# Altium PCB DT-LM.PcbDoc (part 1 of 2)
Units mm, origin at the board's own origin, x right, y up, seen from the top; angles counter-clockwise.
Board outline 100.25 x 53.25 mm, 2 copper layers (Top Layer, Bottom Layer); 126 components, 79 nets, 405 pads, 517 vias.
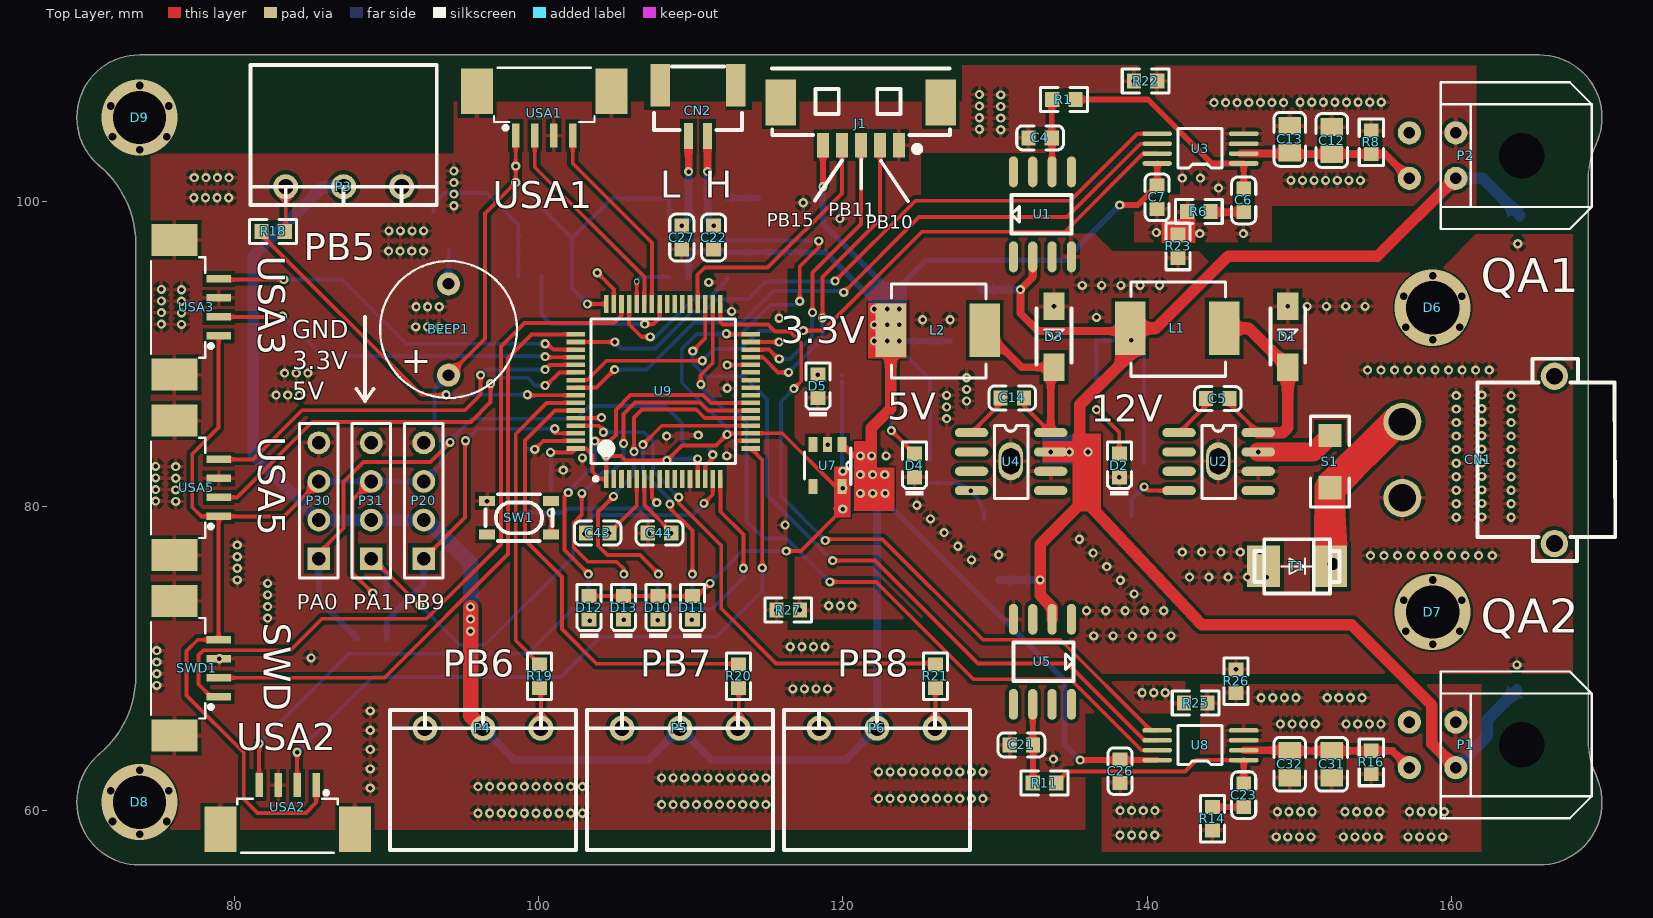
[diagram p0: Top Layer view]
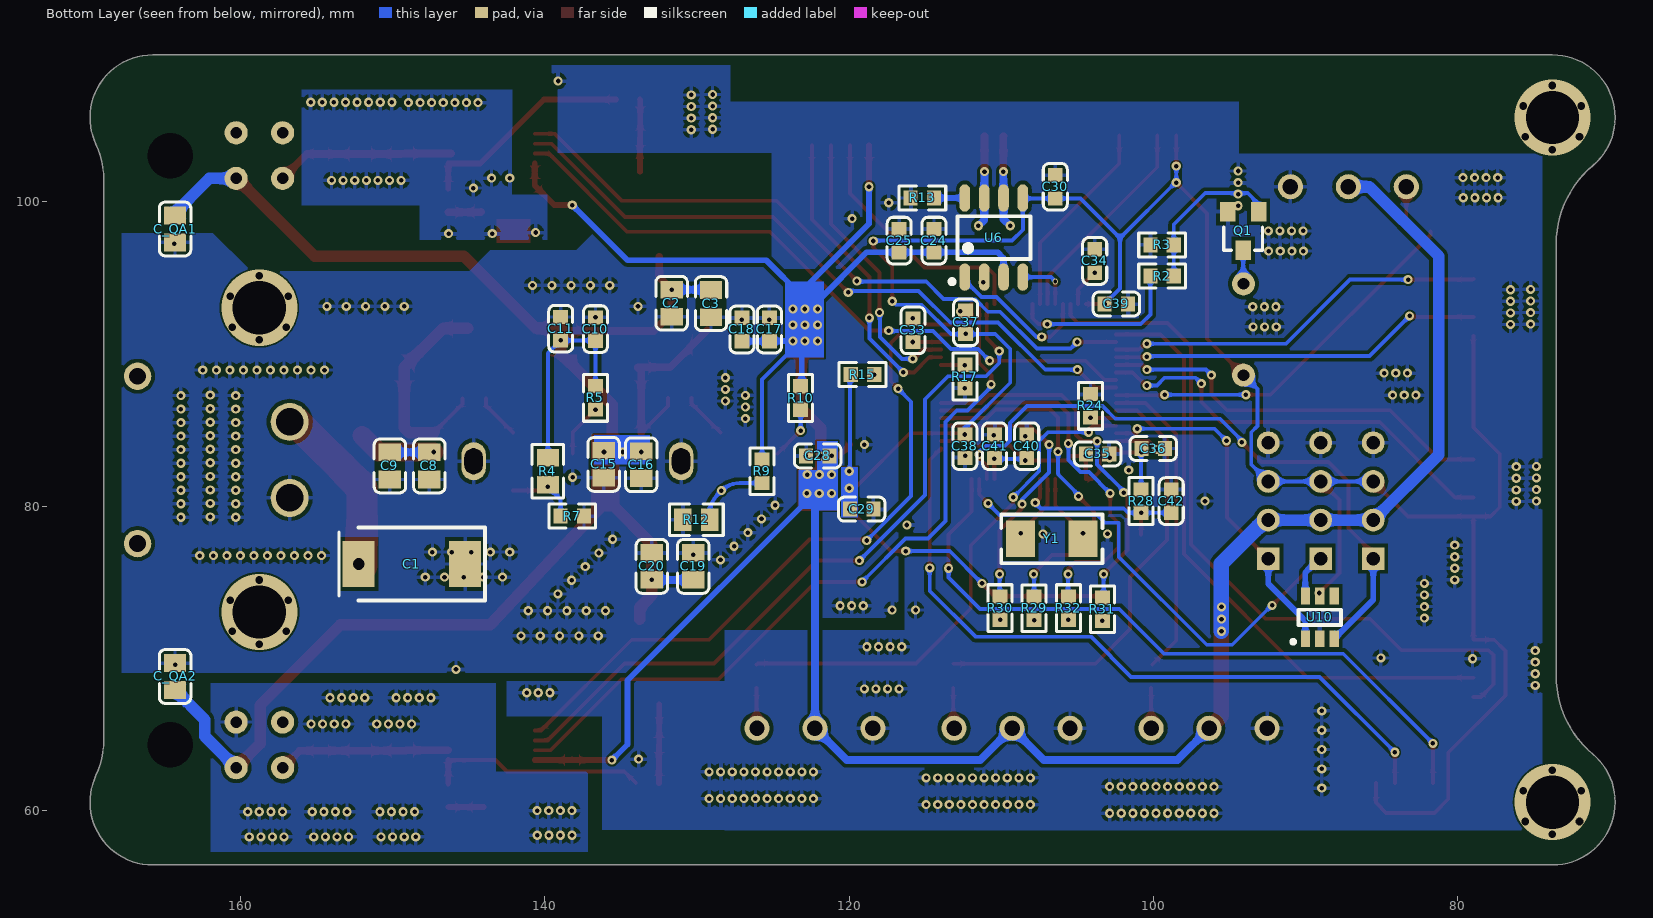
[diagram p1: Bottom Layer view, seen from below]

## Layer stack, top to bottom
Top Solder: solder mask 0.0102, Solder Resist, Dk 3.5
Top Layer: signal copper 0.0356
Dielectric 1: dielectric 0.32, FR-4, Dk 4.8
Bottom Layer: signal copper 0.0356
Bottom Solder: solder mask 0.0102, Solder Resist, Dk 3.5

## Board outline
69.649,60.546 cw(c73.776,60.546) 71.123,63.708 ccw(c66.789,68.873) 73.532,68.873 73.532,97.219 cw(c73.659,97.219) 73.532,97.22 ccw(c66.789,97.219) 71.124,102.384 ccw(c66.789,97.219) 71.123,102.384 cw(c73.776,105.546) 69.649,105.546 cw(c73.776,105.546) 73.776,109.674 cw(c73.776,109.546) 73.818,109.667 cw(c73.859,109.546) 73.859,109.674 165.776,109.674 cw(c165.776,105.546) 169.904,105.546 cw(c165.776,105.546) 169.517,103.802 ccw(c174.501,101.478) 169.002,101.478 169.002,64.614 ccw(c174.501,64.614) 169.517,62.29 cw(c165.776,60.546) 169.904,60.546 cw(c165.776,60.546) 165.776,56.419 73.776,56.419 cw(c73.776,60.546)

## Design rules (kind name [scope] priority, off if disabled: settings)
Clearance [All] p1: gap=0.127 ignorepadtopadclearanceinfootprint=FALSE except(0: Arc-Hole Track-Hole SMDPad-Hole THPad-Hole Via-Hole Fill-Hole Poly-Hole Region-Hole Text-Hole; 0.254: Arc-Fill Arc-Poly Arc-Region Track-Fill Track-Poly Track-Region SMDPad-Fill SMDPad-Poly SMDPad-Region THPad-Fill THPad-Poly THPad-Region)
HoleToHoleClearance [All] p1: gap=0.152 allowstackedmicrovias=TRUE
MinimumSolderMaskSliver [All] p1: minsoldermaskwidth=0.089
PolygonConnect [All] p1: connectstyle=Relief reliefconductorwidth=0.254 reliefentries=4 polygonreliefangle="90 Angle" airgapwidth=0.254
RoutingCorners [All] p1: cornerstyle=45-Degree minsetback=1 maxsetback=1
RoutingVias [All] p1: holewidth=0.3 width=0.6 viastyle="Through Hole" minholewidth=0.051 minwidth=0.127 maxholewidth=5.639 maxwidth=14.097
SilkToSilkClearance [All] p1: silktosilkclearance=0
SilkToSolderMaskClearance [IsPad] p1: minsilkscreentomaskgap=0 clearancetoexposedcopper=TRUE
SolderMaskExpansion [All] p1: expansion=0.051
Width [All] p1: maxlimit=2.54 minlimit=0.254 preferedwidth=0.254 minimp=50.000000 maximp=50.000000 favimp=50.000000
25 further rules are at their usual default settings.

## Components (designator, comment, footprint, x,y, rotation, side; value= is the part's Value field where it differs from the comment)
BEEP1 "Beep(0905)" Beep(0905) 94.082,91.618 r90 top
C1 "10UF" "TAN CAP" 147.168,76.835 r180 bottom
C2 "10uF/0805" 0805_C 131.674,93.345 r90 bottom
C3 "1uF/0805" 0805_C 129.083,93.32 r90 bottom
C4 "100nF" 0603_C 132.969,104.216 r0 top
C5 "10nF" 0603_C 144.653,87.071 r0 top
C6 "10uF" 0603_C 146.355,100.101 r90 top
C7 "1uF" 0603_C 140.665,100.305 r90 top
C8 "10uF" 0805_C 147.599,82.652 r90 bottom
C9 "1uF/0805" 0805_C 150.19,82.652 r90 bottom
C10 "22uF" 0603_C 136.677,91.643 r270 bottom
C11 "1uF" 0603_C 138.963,91.669 r270 bottom
C12 "100nF/0805" 0805_C 152.146,104.039 r270 top
C13 "1uF/0805" 0805_C 149.377,104.116 r270 top
C14 "10nF" 0603_C 131.14,87.122 r0 top
C15 "10uF" 0805_C 136.144,82.753 r90 bottom
C16 "1uF/0805" 0805_C 133.664,82.728 r90 bottom
C17 "22uF" 0603_C 125.247,91.618 r270 bottom
C18 "1uF" 0603_C 127.051,91.618 r270 bottom
C19 "10uF" 0805_C 130.251,76.048 r270 bottom
C20 "1uF/0805" 0805_C 132.969,76.048 r270 bottom
C21 "100nF" 0603_C 131.742,64.313 r0 top
C22 "100pF" 0603_C 111.506,97.663 r90 top
C23 "10uF" 0603_C 146.355,61.011 r90 top
C24 "100nF" LC-0603_C 114.427,97.46 r90 bottom
C25 "4.7uF" 0603_C 116.713,97.46 r90 bottom
C26 "1uF" 0603_C 138.227,62.586 r90 top
C27 "100pF" 0603_C 109.415,97.663 r270 top
C28 "2.2uF" 0603_C 122.072,83.312 r180 bottom
C29 "2.2uF" 0603_C 119.177,79.807 r0 bottom
C30 "4.7uF" 0603_C 106.454,101 r270 bottom
C31 "100nF/0805" 0805_C 152.146,63.042 r90 top
C32 "1uF/0805" 0805_C 149.377,63.042 r90 top
C33 "2.2uF" LC-0603_C 115.81,91.563 r270 bottom
C34 "2.2uF" LC-0603_C 103.861,96.122 r270 bottom
C35 "0.1uF" LC-0603_C 103.675,83.439 r180 bottom
C36 "0.1uF" LC-0603_C 100.016,83.793 r180 bottom
C37 "0.1uF" LC-0603_C 112.344,92.083 r90 bottom
C38 "0.1uF" LC-0603_C 112.395,83.947 r270 bottom
C39 "0.1uF" LC-0603_C 102.438,93.294 r180 bottom
C40 "10nF" LC-0603_C 108.331,83.947 r270 bottom
C41 "1uF" LC-0603_C 110.439,83.947 r270 bottom
C42 "100nF" LC-0603_C 98.831,80.34 r90 bottom
C43 "22pF" LC-0603_C 103.886,78.232 r0 top
C44 "22pF" LC-0603_C 107.95,78.232 r0 top
C_QA1 "1uF/0805" 0805_C 164.313,98.222 r90 bottom
C_QA2 "1uF/0805" 0805_C 164.313,68.809 r270 bottom
CN1 "XT30PW-M" CONN-TH_XT30PW-M 161.776,83.046 r90 top
CN2 "X1251WVS-02HF-LPSW" CONN-SMD_2P-V-P1.25-L_X1251WVS-02HF-LPSW 110.48,106 r180 top
D1 "B340" B340 149.25,91.135 r270 top
D2 "红灯 0603" 0603_LED_S1 138.176,82.677 r90 top
D3 "B340" B340 133.883,91.135 r270 top
D4 "蓝灯 0603" 0603_LED_S1 124.714,82.677 r90 top
D5 "黄灯" 0603_LED_S1 118.364,87.884 r90 top
D6 "定位孔" 定位孔 158.776,93.046 r0 top
D7 "定位孔" 定位孔 158.776,73.046 r0 top
D8 "定位孔" 定位孔 73.776,60.546 r0 top
D9 "定位孔" 定位孔 73.776,105.546 r0 top
D10 "黄灯 0603" LC-0603_LED_S1 107.848,73.322 r90 top
D11 "红灯 0603" LC-0603_LED_S1 110.109,73.322 r90 top
D12 "绿灯 0603" LC-0603_LED_S1 103.327,73.322 r90 top
D13 "蓝灯 0603" LC-0603_LED_S1 105.588,73.322 r90 top
J1 "MX1.25-5P" MX1.25WS-5P 121.183,106.534 r180 top
L1 "L_6.2mm" L_6.2mm 141.986,91.694 r90 top
L2 "L_6.2mm" L_6.2mm 126.238,91.567 r90 top
P1 "MX3.0 4pin" "MX3.0 4pin" 158.747,64.313 r270 top
P2 "MX3.0 4pin" "MX3.0 4pin" 158.747,103.048 r270 top
P3 "KF2EDG_3P" KF2EDG_3P 87.19,101 r180 top
P4 "KF2EDG_3P" KF2EDG_3P 96.342,65.404 r0 top
P5 "KF2EDG_3P" KF2EDG_3P 109.296,65.404 r0 top
P6 "KF2EDG_3P" KF2EDG_3P 122.25,65.404 r0 top
P20 "Header 4" HDR1X4 92.456,76.55 r90 top
P30 "Header 4" HDR1X4 85.555,76.55 r90 top
P31 "Header 4" HDR1X4 89.006,76.55 r90 top
Q1 "8050" NPN_SOT-23 94.107,98.095 r0 bottom
R1 "4.7Ω" 0603_R 134.536,106.731 r180 top
R2 "1KΩ" 0603_R 99.433,95.123 r0 bottom
R3 "10KΩ" 0603_R 99.433,97.18 r180 bottom
R4 "24K" LC-0805_R 139.802,82.301 r90 bottom
R5 "5.1KΩ" 0603_R 136.677,87.122 r90 bottom
R6 "0.3R" LC-0603_R 143.408,99.365 r0 top
R7 "2.7KΩ" 0603_R 138.201,79.35 r0 bottom
R8 "243Ω" 0603_R 154.737,103.919 r270 top
R9 "10KΩ" 0603_R 125.73,82.296 r90 bottom
R10 "1KΩ" 0603_R 123.19,87.114 r90 bottom
R11 "4.7Ω" 0603_R 133.256,61.798 r0 top
R12 "3.3KΩ" LC-0805_R 130.048,79.121 r180 bottom
R13 "1KΩ" 0603_R 115.189,100.263 r0 bottom
R14 "0.3R" LC-0603_R 144.297,59.461 r90 top
R15 "1KΩ" 0603_R 119.126,88.646 r0 bottom
R16 "243Ω" 0603_R 154.737,63.162 r90 top
R17 "10K" LC-0603_R 112.395,88.527 r270 bottom
R18 "510" LC-0603_R 82.55,98.069 r0 top
R19 "510" LC-0603_R 100.076,68.817 r270 top
R20 "510" LC-0603_R 113.157,68.817 r270 top
R21 "510" LC-0603_R 126.086,68.817 r270 top
R22 "0Ω (0R0) ±1%" LC-0603_R 139.903,107.95 r180 top
R23 "0Ω (0R0) ±1%" LC-0603_R 142.037,97.079 r270 top
R24 "10K" LC-0603_R 104.14,86.597 r270 bottom
R25 "0Ω (0R0) ±1%" LC-0603_R 143.192,67.056 r180 top
R26 "0Ω (0R0) ±1%" LC-0603_R 145.847,68.504 r90 top
R27 "0Ω (0R0) ±1%" LC-0603_R 116.408,73.177 r0 top
R28 "4.7K" LC-0603_R 100.813,80.34 r270 bottom
R29 "1KΩ (1001) ±1%" LC-0603_R 107.848,73.287 r90 bottom
R30 "1KΩ (1001) ±1%" LC-0603_R 110.076,73.304 r90 bottom
R31 "1KΩ (1001) ±1%" LC-0603_R 103.353,73.228 r90 bottom
R32 "1KΩ (1001) ±1%" LC-0603_R 105.588,73.304 r90 bottom
S1 "1A_Baoxiansi(1206)" 1A_Baoxiansi(1206) 152.019,82.931 r270 top
SW1 "SKRPADE010" KEY-SMD_4P-L4.2-W3.2-P2.20-LS4.6 98.713,79.24 r180 top
SWD1 "MOLEX1.25_4Pin" MOLEX1.25_4Pin 78.973,69.347 r90 top
T1 "SMB(DO-214AA)" SMB(DO-214AA) 149.936,76.048 r0 top
U1 "ADR445" ADR445 133.121,99.187 r90 top
U2 "TPS5430" TPS5430 144.705,82.931 r0 top
U3 "ADS8320" ADS8320 143.51,103.505 r180 top
U4 "TPS5430" TPS5430 131.064,82.931 r0 top
U5 "ADR445" ADR445 133.121,69.774 r270 top
U6 "TCAN1051" LC-SOIC-8_150mil 110.49,97.663 r180 bottom
U7 "TPS70933" TPS70933 118.999,82.677 r270 top value=Value
U8 "ADS8320" ADS8320 143.51,64.288 r180 top
U9 "STM32F405RGT6" TQFP64_V 108.204,87.544 r90 top
U10 "DW01+G" LC-SOT-23-6 89.068,72.692 r270 bottom
USA1 "MOLEX1.25_4Pin" MOLEX1.25_4Pin 100.375,104.368 r0 top
USA2 "MOLEX1.25_4Pin" MOLEX1.25_4Pin 83.505,61.671 r180 top
USA3 "MOLEX1.25_4Pin" MOLEX1.25_4Pin 78.973,93.071 r90 top
USA5 "MOLEX1.25_4Pin" MOLEX1.25_4Pin 78.973,81.209 r90 top
Y1 "25Mhz" LC-SMD-5032_2P 106.68,77.851 r0 bottom

## Footprints (in the part's own frame and the unit in brackets; to place one, negate y for a bottom-side part, rotate by r counter-clockwise, add the part's x,y. Pads: shape width x height; smd on the part's side, far side on the other; paste and mask are expansions set on the pad)
1A_Baoxiansi(1206) [mil]
  rect 60x60 smd: 1(67.5,0) 2(-67.5,0)
  silkscreen extent -118,-50 118,50
0603_C [mm]
  rect 0.93x0.98 smd: 1(-0.77,0) 2(0.77,0)
  silkscreen extent -1.53,-0.79 1.54,0.79, body extent -0.8,-0.4 0.8,0.4, height 0.3
0603_LED_S1 [mm]
  rect 0.93x0.98 smd: A(0.77,0) K(-0.77,0)
  silkscreen extent -1.98,-0.79 1.54,0.79, body extent -0.8,-0.4 0.8,0.4, height 0.6
0603_R [mm]
  rect 0.93x0.98 smd: 1(-0.77,0) 2(0.77,0)
  silkscreen extent -1.53,-0.79 1.54,0.79, body extent -0.85,-0.4 0.85,0.4, height 0.56
0805_C [mm]
  rect 1.16x1.47 smd: 1(-0.89,0) 2(0.89,0)
  silkscreen extent -1.77,-1.04 1.77,1.04, body extent -1,-0.63 1,0.63, height 0.77
ADR445 [mil]
  oval 80x24 smd: 1(-110,75) 2(-110,25) 3(-110,-25) 4(-110,-75) 5(110,-75) 6(110,-25) 7(110,25) 8(110,75)
  silkscreen extent -50,-75 50,80
ADS8320 [mm]
  oval 1.95x0.3 smd: 1(-2.845,0.975) 2(-2.845,0.325) 3(-2.845,-0.325) 4(-2.845,-0.975) 5(2.845,-0.975) 6(2.845,-0.325) 7(2.845,0.325) 8(2.845,0.975)
  silkscreen extent -1.42,-1.31 1.48,1.26, body extent -2.22,-1.31 2.28,1.26, height 1.2
B340 [mm]
  rect 1.8x1.4 smd: 1(-2,0) 2(2,0)
  silkscreen extent -1.87,-1.14 1.81,1.14
Beep(0905) [mil]
  round 60 hole 30 mask+1: 1(118.11,0) 2(-118.11,0)
  silkscreen extent -177,-177 177,177
CONN-SMD_2P-V-P1.25-L_X1251WVS-02HF-LPSW [mm]
  rect 0.6x1.7 smd: 1(-0.625,1.675) 2(0.625,1.675)
  rect 1.27x2.8 smd: 3(2.475,-1.675) 4(-2.475,-1.675)
  silkscreen extent -2.9,-2.9 2.9,1.27
CONN-TH_XT30PW-M [mm]
  round 2.5 hole 1.8: 1(-2.5,5) 2(2.5,5)
  round 1.8 hole 1.1: 3(5.5,-5) 4(-5.5,-5)
  silkscreen extent -6.65,-8.99 6.65,0.05
HDR1X4 [mm] "Connector; Header; 4 Position"
  rect 1.5x1.5 hole 0.9: 1(0,0)
  round 1.5 hole 0.9: 2(2.54,0) 3(5.08,0) 4(7.62,0)
  silkscreen extent -1.27,-1.27 8.89,1.27
KEY-SMD_4P-L4.2-W3.2-P2.20-LS4.6 [mm]
  rect 1.05x0.65 smd: 1(-2.1,1.1) 2(2.1,1.1) 3(-2.1,-1.1) 4(2.1,-1.1)
  silkscreen extent -2.2,-1.55 2.2,1.52
KF2EDG_3P [mil]
  round 65 hole 40: 1(-150,0) 2(0,0) 3(150,0)
  silkscreen extent -241,-315 241,47
L_6.2mm [mm]
  rect 3.5x2 smd: 1(0,3.086) 2(0,-3.086)
  silkscreen extent -3.15,-3.16 3.05,3.04
LC-0603_C [mm]
  rect 0.93x0.98 smd: 1(-0.77,0) 2(0.77,0)
  silkscreen extent -1.53,-0.79 1.54,0.79, body extent -0.8,-0.4 0.8,0.4, height 0.3
LC-0603_LED_S1 [mm]
  rect 0.93x0.98 smd: A(0.77,0) K(-0.77,0)
  silkscreen extent -1.98,-0.79 1.54,0.79, body extent -0.8,-0.4 0.8,0.4, height 0.6
LC-0603_R [mm]
  rect 0.93x0.98 smd: 1(-0.77,0) 2(0.77,0)
  silkscreen extent -1.53,-0.79 1.54,0.79, body extent -0.85,-0.4 0.85,0.4, height 0.56
LC-0805_R [mm]
  rect 1.16x1.47 smd: 1(-0.89,0) 2(0.89,0)
  silkscreen extent -1.77,-1.04 1.77,1.03, body extent -1,-0.63 1,0.63, height 0.49
LC-SMD-5032_2P [mm]
  rect 1.9x2.4 smd: 1(-2.05,0) 2(2.05,0)
  silkscreen extent -3.32,-1.6 3.32,1.6
LC-SOIC-8_150mil [mm]
  oval 0.7x1.8 smd: 1(-1.905,-2.6) 2(-0.635,-2.6) 3(0.635,-2.6) 4(1.905,-2.6) 5(1.905,2.6) 6(0.635,2.6) 7(-0.635,2.6) 8(-1.905,2.6)
  silkscreen extent -2.9,-3.05 2.4,1.4, body extent -2.45,-2.99 2.45,3.01, height 1.7
LC-SOT-23-6 [mm]
  rect 1.1x0.6 smd: 1(1.4,-0.95) 2(1.4,0) 3(1.4,0.95) 4(-1.4,0.95) 5(-1.4,0) 6(-1.4,-0.95)
  silkscreen extent -0.5,-1.87 1.72,1.4
MOLEX1.25_4Pin [mm]
  rect 0.5x1.6 smd: 1(-1.875,0) 2(-0.625,0) 3(0.625,0) 4(1.875,0)
  rect 2.1x3 smd: 5(-4.425,2.9) 6(4.425,2.9)
  silkscreen extent -3.3,0.38 3.3,4.44
MX1.25WS-5P [mm]
  rect 2x3 smd: 0(-5.257,0) 0(5.257,0)
  rect 0.8x1.6 smd: 1(-2.514,2.811) 2(-1.264,2.811) 3(-0.014,2.811) 4(1.236,2.811) 5(2.486,2.811)
  silkscreen extent -5.86,-2.23 5.83,3.25, body extent -5.74,-2.21 5.66,2.98, height 3.4
"MX3.0 4pin" [mil]
  round 60 hole 30 mask+1: 1(59.06,61.06) 2(59.06,-59.05) 3(-59.05,61.06) 4(-59.05,-59.05)
  round 0 hole 118.11: ""(0,231.13)
  silkscreen extent -190,22 190,413, body extent -200,-70 200,412, height 348
NPN_SOT-23 [mil]
  rect 40x50 smd: B(-40,-50) C(0,50) E(40,-50)
  silkscreen extent -50,-10 50,50
SMB(DO-214AA) [mil]
  rect 85x108 smd: 1(-90,0) 2(84,0)
  silkscreen extent -113,-70 107,70, body extent -110,-77 110,77, height 98
"TAN CAP" [mm]
  rect 2.1x3 smd: 1(-5.08,-0.635) 2(1.92,-0.635)
  silkscreen extent -6.38,-3.04 3.22,1.76
TPS5430 [mm]
  oval 2.2x0.6 smd: 1(-2.6,1.905) 2(-2.6,0.635) 3(-2.6,-0.635) 4(-2.6,-1.905) 5(2.6,-1.905) 6(2.6,-0.635) 7(2.6,0.635) 8(2.6,1.905)
  oval 1.6x2.5 hole 1.2 slot 1.7 at 90 deg: 9(-0.016,0.025)
  silkscreen extent -1.1,-2.41 1.1,2.36
TPS70933 [mm]
  rect 1x0.6 smd paste+0 mask+0.051: 1(-1.375,0.95) 2(-1.375,0) 3(-1.375,-0.95) 4(1.375,-0.95) 5(1.375,0.95)
  silkscreen extent -1.14,-1.52 1.23,1.52, body extent -1.32,-1.42 1.48,1.48, height 1.45
TQFP64_V [mm] "Thin QFP, 64-Leads, Body 10x10mm, Pitch 0.5mm, ST Recommended"
  rect 1.2x0.3 smd: 1(-5.75,3.75) 2(-5.75,3.25) 3(-5.75,2.75) 4(-5.75,2.25) 5(-5.75,1.75) 6(-5.75,1.25) 7(-5.75,0.75) 8(-5.75,0.25) 9(-5.75,-0.25) 10(-5.75,-0.75) 11(-5.75,-1.25) 12(-5.75,-1.75) 13(-5.75,-2.25) 14(-5.75,-2.75) 15(-5.75,-3.25) 16(-5.75,-3.75) 33(5.75,-3.75) 34(5.75,-3.25) 35(5.75,-2.75) 36(5.75,-2.25) 37(5.75,-1.75) 38(5.75,-1.25) 39(5.75,-0.75) 40(5.75,-0.25) 41(5.75,0.25) 42(5.75,0.75) 43(5.75,1.25) 44(5.75,1.75) 45(5.75,2.25) 46(5.75,2.75) 47(5.75,3.25) 48(5.75,3.75)
  rect 0.3x1.2 smd: 17(-3.75,-5.75) 18(-3.25,-5.75) 19(-2.75,-5.75) 20(-2.25,-5.75) 21(-1.75,-5.75) 22(-1.25,-5.75) 23(-0.75,-5.75) 24(-0.25,-5.75) 25(0.25,-5.75) 26(0.75,-5.75) 27(1.25,-5.75) 28(1.75,-5.75) 29(2.25,-5.75) 30(2.75,-5.75) 31(3.25,-5.75) 32(3.75,-5.75) 49(3.75,5.75) 50(3.25,5.75) 51(2.75,5.75) 52(2.25,5.75) 53(1.75,5.75) 54(1.25,5.75) 55(0.75,5.75) 56(0.25,5.75) 57(-0.25,5.75) 58(-0.75,5.75) 59(-1.25,5.75) 60(-1.75,5.75) 61(-2.25,5.75) 62(-2.75,5.75) 63(-3.25,5.75) 64(-3.75,5.75)
  silkscreen extent -5.87,-4.75 4.75,4.75, body extent -5,-5 5,5, height 1.6
定位孔 [mm]

## Part data
C1: library part "TAN CAP"
C2 C31: library part "0805 100nF(104) 10% 50V", "贴片电容", Package=0805, SuppliersPartNumber=C49678, ComponentLink1Description=供?, ComponentLink1URL=http://www.szlcsc.com/product/details_50686.html, Supplier=LC
C3 C9 C12 C13 C16 C20 C32 C_QA1 C_QA2: library part "0805 1uF (105) 10% 50V", "贴片电容", Package=0805, SuppliersPartNumber=C28323, ComponentLink1Description=供?, ComponentLink1URL=http://www.szlcsc.com/product/details_29074.html, Supplier=LC
C4 C6 C21 C22 C23 C27: library part "0603 100nF (104) 10% 50V", "贴片电容", Package=0603, SuppliersPartNumber=C14663, ComponentLink1Description=供?, ComponentLink1URL=http://www.szlcsc.com/product/details_15331.html, Supplier=LC
C5 C14: library part "0603 10nF (103) 10% 50V", "贴片电容", Package=0603, SuppliersPartNumber=C57112, ComponentLink1Description=供?, ComponentLink1URL=http://www.szlcsc.com/product/details_58143.html, Supplier=LC
C7 C10 C17 C26 C35 C36 C37 C38 C39: library part "0603 10uF (106) 10% 10V", "贴片电容", Package=0603, SuppliersPartNumber=C19702, ComponentLink1Description=供?, ComponentLink1URL=http://www.szlcsc.com/product/details_20411.html, Supplier=LC
C8 C15 C19: library part "0805 10uF (106) 10% 25V", "贴片电容", Package=0805, SuppliersPartNumber=C15850, ComponentLink1Description=供?, ComponentLink1URL=http://www.szlcsc.com/product/details_16532.html, Supplier=LC
C11 C18 C28 C29 C43 C44: library part "0603 1uF (105) 10% 50V", "贴片电容", Package=0603, SuppliersPartNumber=C15849, ComponentLink1Description=供?, ComponentLink1URL=http://www.szlcsc.com/product/details_16531.html, Supplier=LC
C24: library part "0603 1nF (102) 10% 50V", "贴片电容", Package=0603, SuppliersPartNumber=C1588, ComponentLink1Description=供?, ComponentLink1URL=http://www.szlcsc.com/product/details_1940.html, Supplier=LC
C25 C30: library part "0603 4.7uF (475) 10% 16V", "贴片电容", Package=0603, SuppliersPartNumber=C19666, ComponentLink1Description=供?, ComponentLink1URL=http://www.szlcsc.com/product/details_20375.html, Supplier=LC
C33 C34 C40 C41: library part "0603 1.5nF (152) 10% 50V", "贴片电容", Package=0603, SuppliersPartNumber=C1595, ComponentLink1Description=供?, ComponentLink1URL=http://www.szlcsc.com/product/details_1947.html, Supplier=LC
C42: library part "0603 1.5pF (1R5) 0.25pF 50V", "贴片电容", Package=0603, SuppliersPartNumber=C1639, ComponentLink1Description=供?, ComponentLink1URL=http://www.szlcsc.com/product/details_1991.html, Supplier=LC
CN1: BOM_Manufacturer="Changzhou Amass Elec", BOM_Manufacturer Part=XT30PW-M, BOM_Supplier=LCSC, BOM_Supplier Part=C431092, Contributor=LCSC, spicePre=C, spiceSymbolName=XT30PW-M
CN2: BOM_Manufacturer="XKB Enterprise", BOM_Manufacturer Part=X1251WVS-02HF-LPSW, BOM_Supplier=LCSC, BOM_Supplier Part=C388714, Contributor=LCSC, spicePre=C
D2 D11: library part "0603 红灯", "发光二极管", Package=0603, SuppliersPartNumber=C2286, ComponentLink1Description=供?, ComponentLink1URL=http://www.szlcsc.com/product/details_2659.html, Supplier=LC
D4 D13: library part "0603 蓝灯", "发光二极管", Package=0603, SuppliersPartNumber=C72041, ComponentLink1Description=供?, ComponentLink1URL=http://www.szlcsc.com/product/details_73150.html, Supplier=LC
D5 D10: library part "0603 黄灯", "发光二极管", Package=0603, SuppliersPartNumber=C72038, ComponentLink1Description=供?, ComponentLink1URL=http://www.szlcsc.com/product/details_73147.html, Supplier=LC
D12: library part "0603 绿灯", "发光二极管", Package=0603, SuppliersPartNumber=C72043, ComponentLink1Description=供?, ComponentLink1URL=http://www.szlcsc.com/product/details_73152.html, Supplier=LC
P20 P30 P31: "Header, 4-Pin", LatestRevisionDate=17-Jul-2002, LatestRevisionNote="Re-released for DXP Platform.", Publisher="Altium Limited"
Q1: library part NPN_SOT-23
R1 R8 R11 R16: library part "0603 4.7Ω (4R70) 1%", "贴片电阻", Package=0603, SuppliersPartNumber=C23164, ComponentLink1Description=供?, ComponentLink1URL=http://www.szlcsc.com/product/details_23891.html, Supplier=LC
R2 R9 R10 R13 R15 R29 R30 R31 R32: library part "0603 1KΩ (1001) 1%", "贴片电阻", Package=0603, SuppliersPartNumber=C21190, ComponentLink1Description=供?, ComponentLink1URL=http://www.szlcsc.com/product/details_21904.html, Supplier=LC
R3 R5 R7: library part "0603 10KΩ (1002) 1%", "贴片电阻", Package=0603, SuppliersPartNumber=C25804, ComponentLink1Description=供?, ComponentLink1URL=http://www.szlcsc.com/product/details_26547.html, Supplier=LC
R4 R12: library part "0805 1.2KΩ (1201) 1%", "贴片电阻", Package=0805, SuppliersPartNumber=C17379, ComponentLink1Description=供?, ComponentLink1URL=http://www.szlcsc.com/product/details_18067.html, Supplier=LC
R6 R14: library part "0603 20Ω (20R0) 1%", "贴片电阻", Package=0603, SuppliersPartNumber=C22950, ComponentLink1Description=供?, ComponentLink1URL=http://www.szlcsc.com/product/details_23677.html, Supplier=LC
R17 R24: library part "0603 1.5MΩ (1504) 1%", "贴片电阻", Package=0603, SuppliersPartNumber=C4172, ComponentLink1Description=供?, ComponentLink1URL=http://www.szlcsc.com/product/details_4579.html, Supplier=LC
R18 R19 R20 R21: library part "0603 1Ω (1R00) 1%", "贴片电阻", Package=0603, SuppliersPartNumber=C22936, ComponentLink1Description=供?, ComponentLink1URL=http://www.szlcsc.com/product/details_23663.html, Supplier=LC
R22 R23 R25 R26 R27: library part "0603 0Ω (0R0) 1%", "贴片电阻", Package=0603, SuppliersPartNumber=C21189, ComponentLink1Description=供?, ComponentLink1URL=http://www.szlcsc.com/product/details_21903.html, Supplier=LC
R28: library part "0603 2.2KΩ (2201) 1%", "贴片电阻", Package=0603, SuppliersPartNumber=C4190, ComponentLink1Description=供?, ComponentLink1URL=http://www.szlcsc.com/product/details_4597.html, Supplier=LC
SW1: BOM_Manufacturer=ALPS, BOM_Manufacturer Part=SKRPADE010, BOM_Supplier=LCSC, BOM_Supplier Part=C127488, Contributor=LCSC, spicePre=S, spiceSymbolName=SKRPADE010
U7: "DC-DCоƬ", Alternate_PartNumber=TPS709xx, Manufacturer="Texas Instruments", CompType=IC, MountType=SMT, PackageReference=SOT_23_5, PartNumber=TPS709xx, PIN_COUNT=5, RefDes=RefDes, RoHS=Y, TYPE=TYPE
U9: "ARM Cortex-M4 32b MCU+FPU, 210DMIP, 1024 kB Flash, 192+4 kB RAM, 51 I/Os, 64-pin LQFP, -40 to +85癈, Tray", Operating Frequency (Processor Speed)=168MHz, 16-bit Timers (IC/OC/PWM)=12x16-bit(24/24/30), 32-bit Timer (IC/OC/PWM)="2x32-bit (8/8/8)", A/D Converter=16x12-bit, ComponentLink1Description="Manufacturer URL", ComponentLink1URL=http://www.st.com/, ComponentLink2Description="STM32F405/7 Datasheet", ComponentLink2URL=http://www.st.com/internet/com/TECHNICAL_RESOURCES/TECHNICAL_LITERATURE/DATASHEET/DM00037051.pdf, ComponentLink3Description="STM32F4 Web Page", ComponentLink3URL=http://www.st.com/internet/mcu/subclass/1521.jsp, D/A Converter=2x12-bit, DatasheetVersion="rev2, Jan-2012", Internal RAM=192kB, Other Timer Functions="2xWDG, RTC, 24-bit down counter", PackageDescription="64-Pin Low Profile Quad Flat Package, 10x10 mm Body, 0.5 mm Pitch", PackageReference=TQFP64, PackageVersion=2012, Serial Interface="3xSPI/2xI2S/2xI2C/3xUSART(IrDa, ISO7816)/3xUART/1xUSB OTG FS/HS, 2xCAN/ SDIO"
U10: "电池保护芯片", Package=SOT-23-6, SuppliersPartNumber=C14213, ComponentLink1Description=供?, ComponentLink1URL=http://www.szlcsc.com/product/details_14870.html, Supplier=LC
Y1: library part "SMD-5032_2P 8MHz 20ppm 20pF", "贴片晶振", Package=SMD-5032_2P, SuppliersPartNumber=C18560, ComponentLink1Description=供?, ComponentLink1URL=http://www.szlcsc.com/product/details_19261.html, Supplier=LC

## Via types
v1: diameter 0.6, hole 0.3, Top Layer to Bottom Layer, 487 vias
v2: diameter 0.5, hole 0.5, Top Layer to Bottom Layer, 24 vias
v3: diameter 5, hole 3.5, Top Layer to Bottom Layer, 4 vias
v4: diameter 0.381, hole 0.254, Top Layer to Bottom Layer, 1 vias
v5: diameter 1.27, hole 0.762, Top Layer to Bottom Layer, 1 vias

## Nets (pads, with @x,y where several pads share a name; then routed paths per layer and width w, separated by ;. In a path a pad name is that pad's centre, name@x,y a point inside that pad or via, vN(x,y) a via of type N, cw(c..) or ccw(c..) an arc to the next point about the centre after c; other vN are vias at no path point)
AGND_QA1: C7.1 C12.1 C13.1 P2.3 R6.1 R8.1 R22.1 R23.1 U3.3 U3.4
  other v1: 143.459,97.917 146.329,97.917 140.614,97.993 144.7,100.914 149.454,101.422 150.216,101.422 150.978,101.422 151.74,101.422 152.502,101.422 153.264,101.422 154.026,101.422 142.316,101.565 143.51,101.565 144.399,106.528 145.161,106.528 145.923,106.528 146.685,106.528 147.447,106.528 148.209,106.528 148.971,106.528 150.063,106.553 150.063,106.553 150.825,106.553 151.587,106.553 152.349,106.553 153.111,106.553 153.873,106.553 154.635,106.553 155.397,106.553
AGND_QA2: C26.1 C31.1 C32.1 P1.3 R14.1 R16.1 R25.1 R26.1 U8.3 U8.4
  other v1: 148.488,58.268 148.488,58.268 149.25,58.268 150.012,58.268 150.774,58.268 152.908,58.268 152.908,58.268 153.67,58.268 154.432,58.268 155.194,58.268 157.15,58.268 157.15,58.268 157.912,58.268 158.674,58.268 159.436,58.268 138.219,58.369 138.219,58.369 138.981,58.369 139.743,58.369 140.505,58.369 148.565,59.919 148.565,59.919 149.327,59.919 150.089,59.919 150.851,59.919 153.01,59.919 153.01,59.919 153.772,59.919 154.534,59.919 155.296,59.919 157.251,59.919 157.251,59.919 158.013,59.919 158.775,59.919 159.537,59.919 138.227,59.995 138.227,59.995 138.989,59.995 139.751,59.995 140.513,59.995 148.768,65.684 148.768,65.684 149.53,65.684 150.292,65.684 151.054,65.684 153.086,65.684 153.086,65.684 153.848,65.684 154.61,65.684 155.372,65.684 147.498,67.412 147.498,67.412 148.26,67.412 149.022,67.412 149.784,67.412 151.841,67.412 151.841,67.412 152.603,67.412 153.365,67.412 154.127,67.412
CAN_H: C22.2 CN2.1 U6.7 | length 6.1
  Top Layer w0.508: v1@111.105,101.981 v1(111.105,102) CN2.1@111.105,104.325
  Bottom Layer w0.508: v1(111.105,102) 111.105,100.283 U6.7@111.125,100.263 111.125,98.814 v1(111.506,98.433)
CAN_L: C27.1 CN2.2 U6.6 | length 6.1
  Top Layer w0.508: CN2.2@109.855,104.325 109.865,104.315 v1(109.865,102)
  Bottom Layer w0.508: v1(109.415,98.433) 109.855,98.873 U6.6@109.855,100.263 109.865,100.273 v1(109.865,102)
DGND: C4.1 C21.1 C22.1 C24.2 C25.2 C27.2 C30.1 C33.1 C34.1 C35.2 C36.2 C37.2 C38.2 C39.2 C40.1 C41.1 C42.2 C43.1 C44.1 J1.1 P3.1 P4.1 P5.1 P6.1 P20.4 P30.4 P31.4 Q1.E R3.1 R13.2 R17.2 R22.2 R24.1 R25.2 R27.1 SW1.4 SWD1.3 SWD1.5 SWD1.6 U6.2 U9.12 U9.18 U9.63 U10.2 USA1.3 USA1.5 USA1.6 USA2.3 USA2.5 USA2.6 USA3.3 USA3.5 USA3.6 USA5.3 USA5.5 USA5.6 | length 4.8
  Top Layer w0.254: v1(99.751,83.736) 100.309,84.294 U9.63@102.454,84.294 ; 112.953,84.294 U9.18@113.954,84.294
  Bottom Layer w0.254: C36.2@99.246,83.793 99.303,83.736 v1(99.751,83.736) ; C37.2@112.344,92.853 C37.2@112.653,92.853
  other v1: 96.022,59.817 96.784,59.817 97.546,59.817 98.308,59.817 99.07,59.817 99.832,59.817 100.594,59.817 101.356,59.817 102.118,59.817 102.88,59.817 108.087,60.389 108.849,60.389 109.611,60.389 110.373,60.389 111.135,60.389 111.897,60.389 112.659,60.389 113.421,60.389 114.183,60.389 114.945,60.389 122.352,60.782 123.114,60.782 123.876,60.782 124.638,60.782 125.4,60.782 126.162,60.782 126.924,60.782 127.686,60.782 128.448,60.782 129.21,60.782 88.939,61.468 96.022,61.571 96.784,61.571 97.546,61.571 98.308,61.571 99.07,61.571 99.832,61.571 100.594,61.571 101.356,61.571 102.118,61.571 102.88,61.571 108.087,62.143 108.849,62.143 109.611,62.143 110.373,62.143 111.135,62.143 111.897,62.143 112.659,62.143 113.421,62.143 114.183,62.143 114.945,62.143 122.352,62.536 123.114,62.536 123.876,62.536 124.638,62.536 125.4,62.536 126.162,62.536 126.924,62.536 127.686,62.536 128.448,62.536 129.21,62.536 88.939,62.738 133.844,63.373 88.939,64.008 88.939,65.278 88.939,66.548 139.675,67.738 140.437,67.738 141.199,67.738 116.717,67.993 117.479,67.993 118.241,67.993 119.003,67.993 74.905,68.227 74.905,68.989 74.905,69.751 79.025,69.972 85.052,70.028 74.905,70.513 116.549,70.764 117.311,70.764 118.073,70.764 118.835,70.764 82.194,72.644 115.638,73.177 82.194,73.406 82.194,74.168 82.194,74.93 80.194,75.158 80.194,75.92 80.194,76.682 80.194,77.444 103.022,78.181 107.264,78.181 116.205,78.765 76.149,80.315 74.828,80.335 96.612,80.34 76.149,81.077 74.828,81.097 76.149,81.839 74.828,81.859 101.625,82.372 76.149,82.601 74.828,82.621 102.88,83.176 112.376,83.312 108.413,84.606 110.5,84.673 82.752,87.3 83.514,87.3 84.276,87.3 112.395,87.757 83.312,88.748 84.074,88.748 84.836,88.748 91.927,91.791 92.689,91.791 93.451,91.791 76.53,91.948 75.209,91.969 115.81,92.358 76.53,92.71 75.209,92.731 112.695,92.812 91.948,93.112 92.71,93.112 93.472,93.112 76.53,93.472 75.209,93.493 76.53,94.234 75.209,94.255 111.186,94.717 90.14,96.774 90.902,96.774 91.664,96.774 92.426,96.774 90.161,98.095 90.923,98.095 91.685,98.095 92.447,98.095 119.812,98.908 94.437,99.751 117.399,99.949 77.348,100.279 78.11,100.279 78.872,100.279 79.634,100.279 94.437,101.275 77.368,101.6 78.13,101.6 78.892,101.6 79.654,101.6 94.437,102.037 130.378,104.75 128.981,104.778 130.378,105.512 128.981,105.54 130.378,106.274 128.981,106.302 130.378,107.036 128.981,107.064 139.133,107.95
NetBEEP1_1: BEEP1.1 Q1.C | length 2.2
  Bottom Layer w0.254: BEEP1.1@94.082,94.618 94.107,94.643 Q1.C@94.107,96.825
NetC4_2: C4.2 R1.2 U1.6 | length 4.8
  Top Layer w0.381: U1.6@133.756,101.981 133.756,104.199 C4.2@133.739,104.216 133.739,106.704 R1.2@133.766,106.731
NetC5_1: C5.1 U2.1 | length 3
  Top Layer w0.254: U2.1@142.105,84.836 143.883,86.614 C5.1@143.883,87.071
NetC5_2: C5.2 D1.2 L1.2 U2.8 | length 14.3
  Top Layer w0.254: C5.2@145.423,87.071 145.423,86.718 U2.8@147.305,84.836
  Top Layer w0.762: L1.2@145.072,91.694 146.692,91.694 D1.2@149.25,89.135 149.25,85.166 148.92,84.836 U2.8@147.305,84.836
NetC6_1: C6.1 R6.2 | length 2.2
  Top Layer w0.508: R6.2@144.178,99.365 144.212,99.331 C6.1@146.355,99.331
NetC14_1: C14.1 U4.1 | length 3.1
  Top Layer w0.254: U4.1@128.464,84.836 130.37,86.742 C14.1@130.37,87.122
NetC14_2: C14.2 D3.2 L2.2 U4.8 | length 13
  Top Layer w0.254: C14.2@131.91,87.122 131.91,86.59 U4.8@133.664,84.836
  Top Layer w0.508: L2.2@129.324,91.567 131.756,89.135 D3.2@133.883,89.135 133.883,89.095 133.664,88.876 U4.8@133.664,84.836
NetC21_2: C21.2 R11.1 U5.6 | length 5.2
  Top Layer w0.381: R11.1@132.486,61.798 132.512,61.824 C21.2@132.512,64.313 132.486,64.338 U5.6@132.486,66.98
NetC23_1: C23.1 R14.2 | length 2.3
  Top Layer w0.254: C23.1@146.337,60.223 C23.1@146.355,60.241
  Top Layer w0.381: R14.2@144.026,60.223 C23.1@146.337,60.223
NetC33_2: C33.2 U9.31 | length 1.9
  Top Layer w0.254: U9.31@113.954,90.793 v1(115.81,90.793)
NetC34_2: C34.2 U9.47 | length 2.5
  Top Layer w0.254: v1(103.861,95.352) 104.954,94.258 U9.47@104.954,93.294
NetD2_A: D2.A R5.1 | length 3.5
  Top Layer w0.254: v1(136.677,86.352) 138.176,84.853 D2.A@138.176,83.447
NetD4_A: D4.A R10.1 | length 3.5
  Top Layer w0.254: v1(123.19,84.971) D4.A@124.714,83.447
  Bottom Layer w0.254: v1(123.19,84.971) R10.1@123.19,86.344
NetD5_A: D5.A R15.1
  other v1: 118.356,88.646
NetD10_K: D10.K R29.1
  other v1: 107.848,72.517
NetD11_K: D11.K R30.1
  other v1: 110.076,72.534
NetD12_K: D12.K R31.1
  other v1: 103.353,72.458
NetD13_K: D13.K R32.1
  other v1: 105.588,72.534
NetP3_3: P3.3 R18.2 | length 2.8
  Top Layer w0.254: R18.2@83.363,98.204 83.38,98.222 P3.3@83.38,101
NetP4_3: P4.3 R19.2 | length 2.6
  Top Layer w0.254: P4.3@100.152,65.404 R19.2@100.152,68.047
NetP5_3: P5.3 R20.2 | length 2.7
  Top Layer w0.254: P5.3@113.106,65.404 P5.3@113.157,65.455 ; R20.2@113.157,68.047 P5.3@113.157,65.455 ; P5.3@113.19,65.489 P5.3@113.157,65.455
NetP6_3: P6.3 R21.2 | length 2.7
  Top Layer w0.254: P6.3@126.06,65.404 126.086,65.43 R21.2@126.086,68.047
NetQ1_B: Q1.B R2.1 R3.2 | length 10.6
  Bottom Layer w0.254: Q1.B@93.091,99.365 93.091,99.873 93.802,100.584 96.596,100.584 98.663,98.517 R3.2@98.663,97.18 R2.1@98.663,95.123
  other v1: 94.437,100.513
NetR4_1: R4.1 R7.2 U2.4 | length 4.7
  Top Layer w0.254: v1(139.802,81.272) 140.048,81.026 U2.4@142.105,81.026
  Bottom Layer w0.254: R7.2@138.971,79.35 138.971,80.442 v1(139.802,81.272)
NetR9_1: R9.1 R12.2 U4.4 | length 5
  Bottom Layer w0.254: R9.1@125.73,81.526 127.19,81.526 cw(c127.19,79.819) v1(128.397,81.026) 128.568,80.855 cw(c126.833,79.121) R12.2@129.286,79.121
NetR13_1: R13.1 U6.8 | length 2
  Bottom Layer w0.381: U6.8@112.395,100.263 R13.1@114.419,100.263
NetR17_1: R17.1 U9.28 | length 1.6
  Top Layer w0.254: v1(112.395,89.281) 113.942,89.281 U9.28@113.954,89.294
NetR24_2: R24.2 U9.60 | length 1.7
  Top Layer w0.254: U9.60@102.454,85.794 104.107,85.793 v1(104.14,85.827)
NRST: C42.1 R28.2 SW1.1 U9.7 | length 12.3
  Top Layer w0.254: SW1.1@100.813,78.14 v1(100.813,79.57) ; U9.7@107.454,81.794 107.454,80.557 v1(107.772,80.239)
  Bottom Layer w0.254: C42.1@98.831,79.57 v1(100.813,79.57) 101.668,79.57 101.956,79.858 107.417,79.858 v1@107.772,80.213
OSC_IN: C43.2 U9.5 Y1.1 | length 4.7
  Top Layer w0.254: v1(104.63,78.232) 106.454,80.056 U9.5@106.454,81.794
  Bottom Layer w0.254: Y1.1@104.384,77.986 v1(104.63,78.232)
OSC_OUT: C44.2 U9.6 Y1.2 | length 4.3
  Top Layer w0.254: U9.6@106.954,81.794 106.954,80.092 108.72,78.326 v1(108.72,78.232)
PA0: P30.1 U9.14 U10.3 | length 42.3
  Top Layer w0.254: P30.1@85.555,76.55 85.555,76.919 87.19,78.554 87.19,81.602 88.494,82.906 92.888,82.906 v1(94.183,84.201) ; U9.14@110.954,81.794 110.954,82.633 111.455,83.134 v1(111.455,83.391)
  Bottom Layer w0.254: v1(94.183,84.201) 94.183,84.303 95.631,85.75 102.514,85.75 103.353,86.589 108.306,86.589 109.427,85.468 109.427,84.307 109.761,83.972 111.023,83.972 111.455,83.541 v1(111.455,83.391)
  Bottom Layer w0.381: P30.1@85.555,76.55 85.555,73.854 U10.3@88.118,71.292
PA1: P31.1 U9.15 U10.6 | length 33.7
  Top Layer w0.254: P31.1@89.115,76.55 v1@92.227,73.438 ; v1(110.871,80.188) 111.454,80.771 U9.15@111.454,81.794
  Bottom Layer w0.254: v1@92.418,73.292 94.818,70.891 96.495,70.891 102.286,76.683 102.286,78.918 103.175,78.918 103.683,79.426 110.109,79.426 v1(110.871,80.188)
  Bottom Layer w0.381: P31.1@89.115,76.55 90.018,75.648 U10.6@90.018,74.092
  other v1: 92.202,73.482